# EAGLE board WAirU_v1.1 (EAGLE 9.2.2)
REV: C
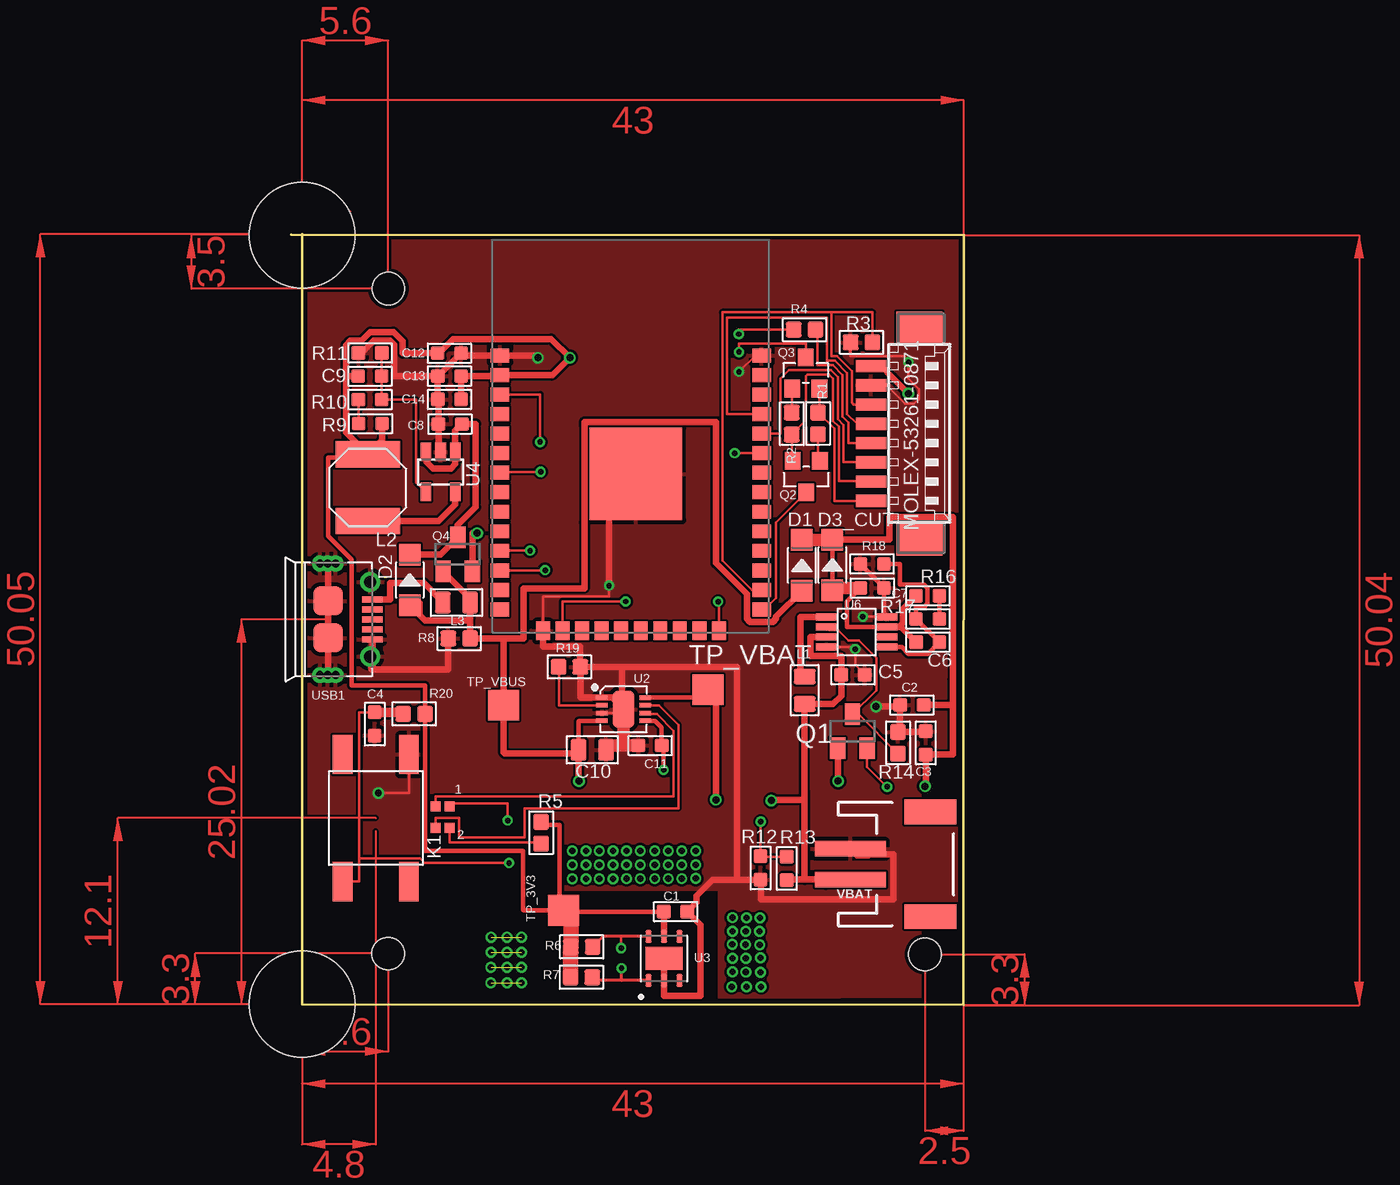
[diagram p0: board, top side]
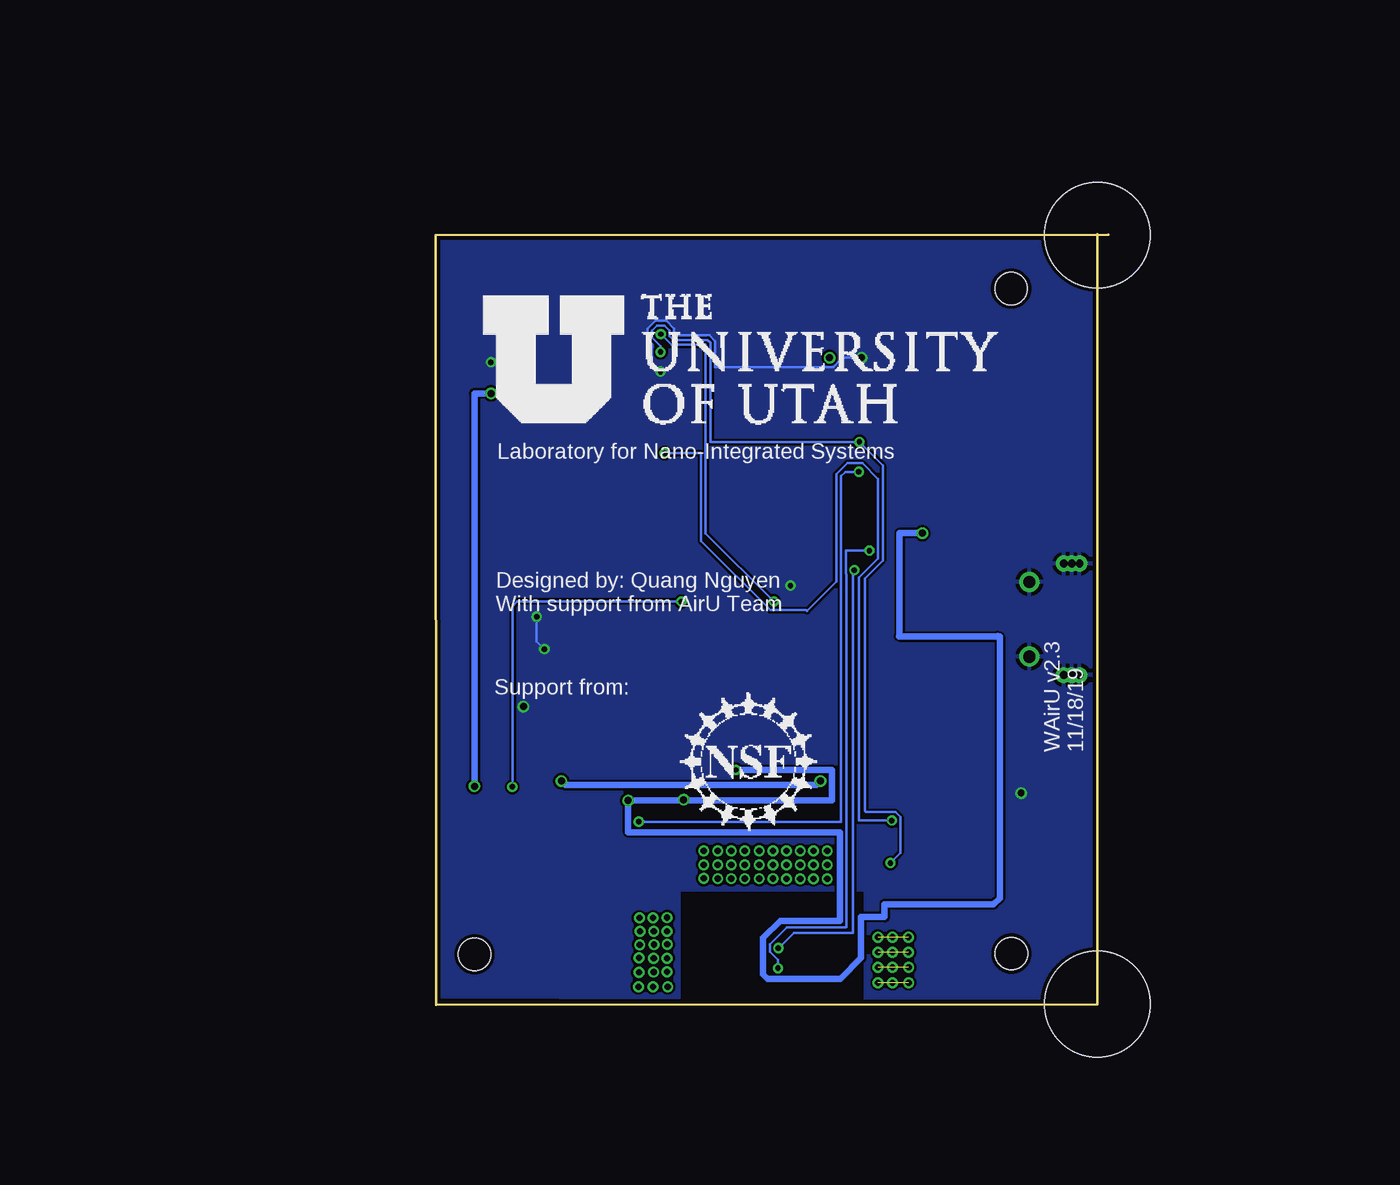
[diagram p1: board, bottom side, seen from below]

Size 43.72 x 50.1 mm. Coordinates in mm from the lower left corner, seen from the top.
Outline: 0,50.05 43.72,50.03 43.7,0 0.7,0.05 0.72,50.1
Copper layers (1*16): Top 0.035mm / dielectric 1.5mm / Bottom 0.035mm
Design rules "seeed-studio-2-layer": minimum track width 6mil, minimum drill 12mil, track to track 6mil, track to pad 6mil, pad to pad 6mil, via to via 6mil, smd to smd 0mil, copper to edge 10mil, drill to drill 10mil, minimum pad ring 10mil, minimum via ring 6mil, stop-mask expansion 2mil, vias tented up to drill 100mil, thermal gap 10mil
Holes 6.86 mm at 0.71,50.04 0.73,0.06
Holes 2.1 mm at 6.31,46.55 6.3,3.34 41.19,3.3

## Footprints (pad centres in the part's own frame; a part is rotated, then mirrored left to right if it is on the bottom)
C0603 = smd 0.889 x 0.889: 1 0,0.762; 2 0,-0.762
C0805 = smd 1.397 x 1.016: 1 0,0.889; 2 0,-0.889
SOD-123 = smd 1.397 x 1.397: + -1.651,0; - 1.651,0
SW4-SMD-6.0X6.0X5.0MM = smd 2.54 x 1.27: 1 -4.129,2.159; 2 -4.129,-2.159; 3 4.129,-2.159; 4 4.129,2.159
L0805 = smd 1.016 x 1.397: 1 -0.889,0; 2 0.889,0
L5040S = smd 4.2 x 1.7: 1 0,2.175; 2 0,-2.175
53261-08 = smd 0.8 x 2: 1 4.375,-2.5; 2 3.125,-2.5; 3 1.875,-2.5; 4 0.625,-2.5; 5 -0.625,-2.5; 6 -1.875,-2.5; 7 -3.125,-2.5; 8 -4.375,-2.5 | smd 2.1 x 3: S1 6.875,0.625; S2 -6.875,0.625
SOT23 = smd 1 x 1.4: 1 -0.95,-1.1; 2 0.95,-1.1; 3 0,1.1
SOT-23 = smd 1.016 x 1.143: 1 -0.889,-1.016; 2 0.889,-1.016; 3 0,1.016
R0603 = smd 1.016 x 1.016: 1 0,0.708; 2 0,-0.708
R0603' = smd 0.889 x 0.889: 1 0,0.762; 2 0,-0.762
TP20SQ = smd 2 x 2: TP 0,0
SMD-19-237A = smd 0.65 x 0.65: 1 -0.7,0.45; 2 0.7,0.45; 3 -0.7,-0.45; 4 0.7,-0.45
DFN8G-0.5-3X3MM = smd 0.3 x 0.727: 1 -0.75,-1.413; 2 -0.25,-1.413; 3 0.25,-1.413; 4 0.75,-1.413; 5 0.75,1.413; 6 0.25,1.413; 7 -0.25,1.413; 8 -0.75,1.413 | smd 2.413 x 1.397: HEAT 0,0
SON100P300X300X80-7N = smd 0.86 x 0.42: 1 -1.435,1; 2 -1.435,0; 3 -1.435,-1; 4 1.435,-1; 5 1.435,0; 6 1.435,1 | smd 1.5 x 2.4: 7 0,0
SOT-23-5 = smd 0.69 x 1.2: 1 -0.95,-1.3; 2 0,-1.3; 3 0.95,-1.3; 4 0.95,1.3; 5 -0.95,1.3
MSOP-8 = smd 0.45 x 1.35: 1 0,0; 2 0.65,0; 3 1.3,0; 4 1.95,0; 5 1.95,3.95; 6 1.3,3.95; 7 0.65,3.95; 8 0,3.95
WROOM32_SKINNY = smd 1.2 x 0.9: 1 -8.5,5; 2 -8.5,3.73; 3 -8.5,2.46; 4 -8.5,1.19; 5 -8.5,-0.08; 6 -8.5,-1.35; 7 -8.5,-2.62; 8 -8.5,-3.89; 9 -8.5,-5.16; 10 -8.5,-6.43; 11 -8.5,-7.7; 12 -8.5,-8.97; 13 -8.5,-10.24; 14 -8.5,-11.51; 25 8.5,-11.51; 26 8.5,-10.24; 27 8.5,-8.97; 28 8.5,-7.7; 29 8.5,-6.43; 30 8.5,-5.16; 31 8.5,-3.89; 32 8.5,-2.62; 33 8.5,-1.35; 34 8.5,-0.08; 35 8.5,1.19; 36 8.5,2.46; 37 8.5,3.73; 38 8.5,5 | smd 0.9 x 1.2: 15 -5.7,-12.9; 16 -4.43,-12.9; 17 -3.16,-12.9; 18 -1.89,-12.9; 19 -0.62,-12.9; 20 0.65,-12.9; 21 1.92,-12.9; 22 3.19,-12.9; 23 4.46,-12.9; 24 5.73,-12.9 | smd 6 x 6: P$1 0.34,-2.7
MICRO-USB5+6P-SMD-0.65-AB = smd 0.4 x 1.35: 1 -1.3,2.875; 2 -0.65,2.875; 3 0,2.875; 4 0.65,2.875; 5 1.3,2.875 | smd 1.9 x 1.9: P1 -1.2,0; P2 1.2,0 | drill 0.508 pad 1.016: P3_1 -3.625,-0.533; P3_2 -3.625,-0.025; P3_3 -3.625,0.483; P4_1 3.625,-0.533; P4_2 3.625,-0.025; P4_3 3.625,0.483 | drill 0.8: P5 -2.425,2.73; P6 2.425,2.73
JST-2-SMD = smd 1 x 4.6: 1 -1,-3.7; 2 1,-3.7 | smd 1.6 x 3.4: NC1 -3.4,1.5; NC2 3.4,1.5

## Placement (x,y rotation side)
C1  1uf  [C0603]  24.98,6.06 270 top
C2  100nf  [C0603]  40.34,19.49 90 top
C3  1uf  [C0603]  41.24,17.03 0 top
C4  1uf  [C0603]  5.43,18.27 180 top
C5  10uf  [C0603]  36.52,21.46 270 top
C6  22uf  [C0603]  41.37,23.58 270 top
C7  22uf  [C0603]  37.77,27.1 270 top
C8  10uf  [C0603]  10.33,37.76 90 top
C9  100pf  [C0603]  5.12,40.87 270 top
C10  22uf  [C0805]  19.57,16.58 270 top
C11  4.7uf  [C0603]  23.32,16.86 90 top
C12  10uf  [C0603]  10.28,42.37 270 top
C13  10uf  [C0603]  10.29,40.87 90 top
C14  10uf  [C0603]  10.29,39.36 90 top
D1  20V-1A  [SOD-123]  33.19,28.57 90 top
D2  20V-1A  [SOD-123]  7.71,27.63 90 top
D3_CUT  20V-1A  [SOD-123]  35.17,28.59 90 top
K1  [SW4-SMD-6.0X6.0X5.0MM]  5.5,12.15 90 top
L1  2.2UH-1.2A  [L0805]  33.37,20.46 90 top
L2  4.7uH  [L5040S]  4.98,33.62 180 top
L3  330R-1500MA  [L0805]  10.74,26.16 0 top
MOLEX-53261-0871  53261-08  [53261-08]  40.2,37.15 270 top
Q1  BSS84  [SOT23]  36.48,17.8 0 top
Q2  MMBT3904LT1G  [SOT-23]  33.47,34.35 180 top
Q3  MMBT3904LT1G  [SOT-23]  33.44,41.08 0 top
Q4  BSS84  [SOT23]  10.82,29.29 0 top
R1  10K  [R0603]  34.24,37.8 0 top
R2  10K  [R0603]  32.54,37.79 180 top
R3  4.7K  [R0603]  37.07,43.07 90 top
R4  220R  [R0603]  33.37,43.89 90 top
R5  330R  [R0603]  16.25,11.19 180 top
R6  4.7K  [R0603]  18.89,3.79 270 top
R7  4.7K  [R0603]  18.87,1.8 270 top
R8  100K 1/10W  [R0603]  10.92,23.82 90 top
R9  470K  [R0603']  5.15,37.79 90 top
R10  69.8K 1/10W  [R0603']  5.12,39.35 90 top
R11  120K  [R0603']  5.14,42.38 90 top
R12  100K 1/10W  [R0603']  30.51,8.91 180 top
R13  100K 1/10W  [R0603']  32.21,8.88 0 top
R14  100K 1/10W  [R0603]  39.44,17.04 0 top
R16  680K  [R0603']  41.37,26.59 90 top
R17  69.8K 1/10W  [R0603']  41.37,25.09 90 top
R18  100K 1/10W  [R0603']  37.76,28.66 90 top
R19  6.8K  [R0603]  18.08,21.98 270 top
R20  10K  [R0603]  7.99,18.92 270 top
TP_3V3  TPTP20SQ  [TP20SQ]  17.7,6.14 0 top
TP_VBAT  TPTP20SQ  [TP20SQ]  27.08,20.5 0 top
TP_VBUS  TPTP20SQ  [TP20SQ]  13.8,19.48 180 top
U1  19-237A/BHR6GHC-M01/2T  [SMD-19-237A]  9.83,12.22 270 top
U2  CN3065-DFN8  [DFN8G-0.5-3X3MM]  21.6,19.22 270 top
U3  HDC1080DMBT  [SON100P300X300X80-7N]  24.23,3.02 90 top
U4  PAM2305AABADJ  [SOT-23-5]  9.71,34.64 180 top
U6  PAM2401  [MSOP-8]  34.78,25.21 270 top
U7  ESP32_WROOM32_SKINNY  [WROOM32_SKINNY]  22.07,37.22 0 top
USB1  ZX62-B-5PA  [MICRO-USB5+6P-SMD-0.65-AB]  2.41,25.07 270 top
VBAT  [JST-2-SMD]  40.05,9.15 270 top

## Library data of the parts
C1 C3 C4 = Seeed-Capacitor; MPN: CC0603KRX7R8BB105
C2 = Seeed-Capacitor; MPN: CC0603KRX7R9BB104
C5 C8 C12-C14 = Seeed-Capacitor; MPN: CC0603KRX5R6BB106
C6 C7 = OPL_Capacitor; MPN: CC0603KRX5R6BB106
C9 = OPL_Capacitor; MPN: CC0603JRNPO9BN101
C10 = Seeed-OPL-Capacitor; MPN: CC0805MKX5R5BB226
C11 = OPL_Capacitor; MPN: CC0603KRX5R6BB475
D1 D2 D3_CUT = Seeed-OPL-Diode; MPN: B5819W
K1 = OPL_Switch; MPN: DTSM-62K-S-V-T/R(SN431)
L1 = OPL_Inductor; MPN: LQM2MPN2R2MG0
L2 = OPL_Inductor
L3 = Seeed-Inductor; MPN: BLM21PG331SN1D
MOLEX-53261-0871 = con-molex; MF: MOLEX; OC_FARNELL: 1125376; OC_NEWARK: unknown
Q1 Q4 = BSS84; AVAILABILITY: Unavailable; DESCRIPTION: P-Channel Enhancement Mode Field Effect Transistor; MF: MICROSS/On Semiconductor; MP: BSS84; PACKAGE: SOT-23 ON Semiconductor; PRICE: None
Q2 Q3 = Seeed-Transistor; MPN: MMBT3904LT1G
R1 R2 R20 = Seeed-Resistor; MPN: RC0603FR-0710KL
R3 R4 = Seeed-Resistor; MPN: RC0603JR-07220RL
R5 = Seeed-Resistor; MPN: RC0603FR-07330RL
R6 R7 = Seeed-Resistor; MPN: RC0603JR-074K7L
R8 R14 = Seeed-Resistor; MPN: RC0603JR-07100KL
R9 = Seeed-OPL-Resistor; MPN: RC0603FR-07470KL
R10 R17 = Seeed-OPL-Resistor; MPN: RC0603FR-0769K8L
R11 = Seeed-OPL-Resistor; MPN: RC0603FR-07120KL
R12 R13 R18 = OPL_Resistor; MPN: RC0603JR-07100KL
R16 = Seeed-OPL-Resistor; MPN: RC0603FR-07680KL
R19 = Seeed-Resistor; MPN: RC0805JR-07220KL
TP_3V3 TP_VBAT TP_VBUS = testpad
U1 = SS_OPL_Unmade
U2 = Seeed-IC; MPN: CN3065
U3 = HDC1080DMBT_TITempHum; DESCRIPTION: HDC1080 Low Power, High Accuracy Digital Humidity Sensor with Temperature Sensor 6-WSON -40 to 125; DIGI-KEY_PART_NUMBER: 296-43864-1-ND; DIGI-KEY_PURCHASE_URL: https://www.digikey.com/product-detail/en/texas-instruments/HDC1080DMBT/296-43864-1-ND/5878615?utm_source=snapeda&utm_medium=aggregator&utm_campaign=symbol; MF: Texas Instruments; MP: HDC1080DMBT; PACKAGE: WDFN-6 Texas Instruments
U4 = OPL_IC; MPN: LP2985-33DBVR
U6 = PAM2401_dcdcConverter
U7 = microbuilder
USB1 = Seeed-Connector; MPN: ZX62-B-5PA
VBAT = SparkFun-Connectors; PROD_ID: CONN-11443

## Nets
3.3V: C1.2 C9.2 C12.2 C13.2 C14.2 L2.2 R5.2 R6.2 R7.2 R9.2 R20.1 TP_3V3.TP U3.5 U7.2
5.0V: C2.2 C3.2 D1.- D3_CUT.- MOLEX-53261-0871.8
BAT_CHECK: R12.2 R13.1 U7.7
CHARGING: U1.4 U2.7
CHG_DONE: U1.3 U2.6
DTR: MOLEX-53261-0871.2 Q2.2 R2.1
EN_PAM2401: Q1.2 U7.24
GND: C1.1 C2.1 C3.1 C4.1 C5.1 C7.1 C8.1 C10.1 C11.1 C12.1 C13.1 C14.1 K1.3 MOLEX-53261-0871.7 R3.1 R8.1 R11.1 R12.1 R14.1 R18.1 R19.1 U2.1 U2.3 U2.HEAT U3.2 U3.7 U4.2 U6.4 U6.8 U7.1 U7.15 U7.38 U7.P$1 USB1.5 USB1.P1 USB1.P2 USB1.P3_1 USB1.P3_2 USB1.P3_3 USB1.P4_1 USB1.P4_2 USB1.P4_3 USB1.P5 USB1.P6 VBAT.1
GP_LED: U1.1 U7.33
GPIO0: Q2.3 U7.25
N$3: L1.2 U6.1
N$6: R19.2 U2.2
N$7: Q1.3 R14.2 U6.2
N$8: L2.1 U4.5
N$9: R5.1 U1.2
N$10: C6.1 R17.1 R18.2 U6.5
N$12: Q3.1 R2.2
N$13: Q2.1 R1.2
N$22: C9.1 R10.2 R11.2 U4.4
N$24: R16.2 R17.2
N$82: R9.1 R10.1
PAM2401_OUT: C6.2 C7.2 D3_CUT.+ R16.1 U6.7
PM_SET: MOLEX-53261-0871.6 R3.2 U7.26
PMS_TX: MOLEX-53261-0871.4 R4.2
RESET: C4.2 K1.1 Q3.3 R20.2 U7.3
RTS: MOLEX-53261-0871.1 Q3.2 R1.1
RXD0: MOLEX-53261-0871.3 U7.34
SCL: R6.1 U3.6 U7.12
SDA: R7.1 U3.1 U7.11
TXD0: MOLEX-53261-0871.5 U7.35
U2RXD: R4.1 U7.16
V_IN: C8.2 D2.- Q4.3 U4.1 U4.3
VBAT: C5.2 C11.2 L1.1 Q4.2 R13.2 TP_VBAT.TP U2.5 U2.8 U6.3 VBAT.2
VBUS: C10.2 D1.+ D2.+ L3.2 Q1.1 Q4.1 R8.2 TP_VBUS.TP U2.4
VBUS_RAW: L3.1 USB1.1

## Tracks (layer width: path | path; a pad name or v marks a point on that pad's centre or on a via)
3.3V  (via drill 0.45)
  Top 0.152: 9.45,42.47 9.52,42.4 C12.2 | 13.6,40.98 U7.2 | 4.77,35.59 L2.2 | R5.2 16.43,11.72 | 17.44,6.41 TP_3V3.TP | 17.7,5.63 TP_3V3.TP | 17.78,6.06 TP_3V3.TP | 15.08,6.17 15.11,6.14
  Top 0.203: 24.23,6.05 C1.2 | R6.2 18.16,3.76
  Top 0.305: 4.77,35.59 2.41,35.59 2.41,30.5 3.93,28.97 3.93,20.78 8.7,20.78 R20.1 8.7,10.01 15.08,10.01 15.08,6.17 | 15.11,6.14 TP_3V3.TP | 16.43,11.72 17.44,11.72 17.44,6.41 | 18.18,5.15 17.7,5.63 | C1.2 17.78,6.06
  Top 0.406: U3.5 24.23,6.05 | C14.2 C13.2 13.49,40.87 U7.2 17,40.95 v18.12,42.07 16.9,43.29 10.52,43.29 9.7,42.47 9.45,42.47 | R9.2 5.91,36.73 L2.2 3.56,37.21 3.56,40.87 | C9.2 3.56,40.87 | 3.56,40.87 3.56,42.9 3.85,43.18 4.58,43.18 5.14,43.74 6.66,43.74 7.26,43.14 7.26,42.37 C12.2
  Top 1.016: R6.2 18.18,5.15 | 18.16,3.76 R7.2
5.0V  (via drill 0.45)
  Top 0.152: MOLEX-53261-0871.8 37.66,41.57
  Top 0.305: 35.15,30.22 D3_CUT.-
  Top 0.406: 41.07,19.52 C2.2 | 41.18,16.33 C3.2 | v40.12,39.75 39.05,40.82 38.35,41.53 MOLEX-53261-0871.8 | D3_CUT.- 38.88,30.25 38.88,31.71 42.99,31.71 42.99,22.87 42.99,21.16 42.99,19.52 | C2.2 41.24,19.35 | 41.24,16.47 C3.2 | 42.99,19.52 42.99,16.29 42.97,16.27 C3.2 | C3.2 41.24,14.26 v41.2,14.22 | C2.2 42.97,19.49 42.99,19.52
  Top 0.813: D1.- 35.15,30.22
  Bottom 0.406: v40.12,39.75 41.2,39.75 v41.2,14.22
BAT_CHECK  (via drill 0.35)
  Top 0.152: v16.21,34.65 13.62,34.65 U7.7 | R13.1 30.54,9.64 R12.2 30.51,11.91 v30.52,11.92
  Bottom 0.152: v16.21,34.65 17.09,34.65 17.37,34.38 17.37,11.9 30.5,11.9 v30.52,11.92
CHARGING
  Top 0.152: 9.51,11.52 U1.4 9.38,12.15 10.91,12.15 10.91,10.88 15.18,10.88 15.18,12.79 25.17,12.79 25.17,18.19 23.9,19.46 23.03,19.46 U2.7
CHG_DONE
  Top 0.152: U2.6 23.08,18.91 23.76,18.91 24.86,17.81 24.86,13.54 9.38,13.54 U1.3
DTR
  Top 0.152: Q2.2 32.54,35.41 R2.1 33.47,38.01 33.47,40.89 33.54,40.97 34.95,40.97 35.22,40.7 35.22,37.96 35.6,37.58 35.6,34.05 37.68,34.05 MOLEX-53261-0871.2
EN_PAM2401  (via drill 0.35)
  Top 0.152: Q1.2 37.43,15.49 v38.73,14.18 | U7.24 27.8,26.17 v27.75,26.21
  Bottom 0.152: v27.75,26.21 38.43,26.21 38.73,25.91 v38.73,14.18
GND  (via drill 0.35, 0.45)
  Top 0.152: 11.19,42.22 C12.1 | U4.2 9.57,36.09 | 9.57,39.32 C14.1 | U7.38 30.17,42.22 v29.11,41.16 | R3.1 36.36,42.18 39.83,42.18 40.13,41.87 40.13,41.78 v40.12,41.77 40.12,40.7 40.8,40.03 40.8,39.39 40.49,39.08 39.87,39.08 38.68,40.28 MOLEX-53261-0871.7 | U7.15 16.37,26.56 20.66,26.56 v20.66,27.26 | U2.3 21.35,18.97 21.59,19.21 | U6.4 36.53,23.26 v36.66,23.13 36.66,22.08 C5.1 | v37.15,25.24 38.69,25.24 38.73,25.28 | v5.67,13.77 7.66,13.77 7.67,13.79 7.66,13.79 K1.3
  Top 0.203: C13.1 9.55,40.87
  Top 0.305: U6.8 38.73,25.28 38.53,25.48 C7.1 38.53,27.13 R18.1
  Top 0.406: 11.19,42.22 U7.1 15.88,42.22 v16.03,42.07 | 9.57,36.09 C8.1 9.57,39.32 | C12.1 9.55,40.87 | R11.1 4.57,42.38 5.37,43.18 6.42,43.18 6.7,42.91 6.7,41.85 6.68,41.84 6.68,40.86 6.69,40.87 C13.1 C14.1 | C3.1 41.2,17.75 R14.1 39.58,17.89 C2.1 39.48,19.4 v38.02,19.4 | 20.74,16.86 21.59,16.86 C11.1 | 21.59,19.21 U2.HEAT 20.85,19.98 18.8,19.98 18.8,21.96 R19.1 | R19.1 21.49,21.98 | 21.49,21.98 28.97,21.98 28.97,8.15 | 21.49,21.98 21.49,19.31 | 28.97,8.15 27.4,8.15 26.34,7.08 26.34,6.66 C1.1 26.6,5.2 26.6,0.61 24.23,0.61 U3.2 U3.7 | 28.97,8.15 R12.1 30.55,8.11 30.55,6.86 39.16,6.86 39.16,9.79 36.71,9.79 VBAT.1 36.77,9.73 37.51,9.73 37.41,9.83 | R8.1 10.21,21.82 5.24,21.82 USB1.P6 5.28,22.07 USB1.5 | U7.15 16.37,23.3 16.38,23.29 18.79,23.29 R19.1 | v20.66,27.26 20.66,32.77 U7.P$1 | USB1.P4_2 USB1.P4_3 | USB1.P4_1 USB1.P4_2 | USB1.P3_1 USB1.P3_2 | USB1.P3_2 2.41,27.95 USB1.P1 USB1.P2 2.41,21.47 USB1.P4_2 | USB1.P3_2 USB1.P3_3
  Top 0.813: C10.1 20.74,16.86 C11.1 | 21.59,16.86 21.59,19.21 21.49,19.31
  Bottom 0.152: v16.03,42.07 17.27,42.07 17.87,41.47 23.62,41.47 23.63,41.46 25.56,41.46 25.56,43.16 25.92,43.53 28.14,43.53 28.22,43.61 28.22,43.96 28.73,44.47 29.39,44.47 29.42,44.49 29.95,43.96 29.95,43.25 29.66,42.96 29.66,41.71 v29.11,41.16 | v36.66,23.13 37.15,23.63 v37.15,25.24
  pour Top: 1.02,0.44 1.02,49.71 43.53,49.71 43.53,0.56 27.86,0.49 27.86,7.52 15.77,7.52 15.77,0.44
  pour Bottom: 1.02,0.44 1.02,49.71 43.53,49.71 43.53,0.57 27.89,0.5 27.89,7.52 15.8,7.52 15.8,0.44
GP_LED  (via drill 0.35)
  Top 0.152: U7.33 v28.83,35.87 | v14.07,11.99 14.07,13.11 10.47,13.11 U1.1
  Bottom 0.152: v28.83,35.87 26.47,35.87 26.47,35.86 26.47,30.17 21.97,25.67 19.64,25.67 19.58,25.61 17.67,27.51 17.67,34.51 16.97,35.21 15.98,35.21 14.97,34.2 14.97,29.02 16.21,27.78 16.21,12 v14.07,12 v14.07,11.99
GPIO0
  Top 0.152: Q2.3 31.5,31.36 31.5,26.46 30.75,25.71 U7.25
N$2  (via drill 0.4 pad 0.6)  (2 unrouted)
  other vias: 14.97,1.45 14.03,1.45 12.98,1.45
N$3
  Top 0.406: U6.1 33.11,25.21 33.11,21.61 L1.2
N$4  (via drill 0.4)
  other vias: 28.68,3.04
N$5  (via drill 0.4)
  other vias: 29.55,3.03
N$6
  Top 0.152: U2.2 17.41,19.47 17.41,21.94 R19.2
N$7
  Top 0.152: 35.27,24.63 34.86,24.63 U6.2 | 36.58,19 Q1.3 | 36.48,19.35 Q1.3 | 34.86,24.63 U6.2 | R14.2 36.87,18.9 Q1.3 | U6.2 34.98,24.36 35.55,24.36 36.23,23.69 36.89,23.69 38.03,22.54 38.03,20.45 Q1.3
N$8
  Top 0.152: U4.5 10.61,33.4 | 5,31.47 L2.1
  Top 0.406: U4.5 10.66,32.54 9.6,31.47 5,31.47
N$9
  Top 0.152: U1.2 10.28,10.55 16.18,10.55 R5.1
N$10
  Top 0.305: C6.1 42.12,23.58 | 42.12,23.58 R17.1 40.61,25.83 40.62,25.84 41.12,25.84 41.36,26.09 41.36,27.1 41.12,27.34 39.56,27.34 39.56,28.66 R18.2 | U6.5 39.68,23.26 40.11,22.83 41.37,22.83 42.12,23.58
N$11  (via drill 0.4)
  other vias: 18.27,8.21
N$12
  Top 0.152: Q3.1 32.56,38.51 R2.2
N$13
  Top 0.152: R1.2 34.24,35.49 Q2.1
N$14  (via drill 0.4)
  other vias: 21.8,8.21
N$15  (via drill 0.4 pad 0.6)  (2 unrouted)
  other vias: 14.97,2.44 14.03,2.44 12.98,2.44
N$16  (via drill 0.4 pad 0.6)  (2 unrouted)
  other vias: 14.98,3.42 14.04,3.42 12.99,3.42
N$18  (via drill 0.4)
  other vias: 28.68,2.15
N$19  (via drill 0.4 pad 0.6)  (2 unrouted)
  other vias: 14.98,4.41 14.04,4.41 12.99,4.41
N$20  (via drill 0.4)
  other vias: 19.16,8.21
N$21  (via drill 0.4)
  other vias: 22.69,8.21
N$22
  Top 0.152: U4.4 8.14,33.97 8.14,39.35 R10.2 C9.1 5.88,42.44 R11.2
N$23  (via drill 0.4)
  other vias: 24.5,8.22
N$24
  Top 0.305: R17.2 | R17.2 R16.2
N$25  (via drill 0.4)
  other vias: 29.55,2.14
N$26  (via drill 0.4)
  other vias: 30.45,3.92
N$27  (via drill 0.4)
  other vias: 30.51,3.06
N$28  (via drill 0.4)
  other vias: 30.5,2.12
N$29  (via drill 0.4)
  other vias: 20.02,8.21
N$30  (via drill 0.4)
  other vias: 20.93,8.21
N$31  (via drill 0.4)
  other vias: 26.29,8.22
N$34  (via drill 0.4)
  other vias: 28.63,1.19
N$35  (via drill 0.4)
  other vias: 28.67,3.94
N$36  (via drill 0.4)
  other vias: 25.39,8.22
N$37  (via drill 0.4)
  other vias: 28.68,4.79
N$38  (via drill 0.4)
  other vias: 18.27,9.1
N$39  (via drill 0.4)
  other vias: 21.8,9.1
N$40  (via drill 0.4)
  other vias: 22.69,9.1
N$41  (via drill 0.4)
  other vias: 24.5,9.11
N$42  (via drill 0.4)
  other vias: 23.63,9.1
N$43  (via drill 0.4)
  other vias: 19.16,9.1
N$44  (via drill 0.4)
  other vias: 20.02,9.1
N$45  (via drill 0.4)
  other vias: 20.93,9.1
N$46  (via drill 0.4)
  other vias: 23.63,8.22
N$53  (via drill 0.4)
  other vias: 29.6,1.19
N$54  (via drill 0.4)
  other vias: 29.54,3.93
N$55  (via drill 0.4)
  other vias: 29.54,4.79
N$56  (via drill 0.4)
  other vias: 26.29,9.11
N$57  (via drill 0.4)
  other vias: 25.39,9.1
N$61  (via drill 0.4)
  other vias: 30.43,4.79
N$62  (via drill 0.4)
  other vias: 30.47,5.66
N$64  (via drill 0.4)
  other vias: 30.54,1.19
N$67  (via drill 0.4)
  other vias: 18.27,10.01
N$68  (via drill 0.4)
  other vias: 21.8,10.02
N$69  (via drill 0.4)
  other vias: 22.69,10.02
N$71  (via drill 0.4)
  other vias: 28.67,5.68
N$72  (via drill 0.4)
  other vias: 29.59,5.66
N$73  (via drill 0.4)
  other vias: 24.5,10.02
N$74  (via drill 0.4)
  other vias: 23.63,10.02
N$75  (via drill 0.4)
  other vias: 19.16,10.01
N$76  (via drill 0.4)
  other vias: 20.02,10.01
N$77  (via drill 0.4)
  other vias: 20.93,10.01
N$79  (via drill 0.4)
  other vias: 26.29,10.02
N$80  (via drill 0.4)
  other vias: 25.39,10.02
N$82
  Top 0.152: R10.1 4.39,39.32 R9.1
PAM2401_OUT
  Top 0.305: 36.91,27.19 C7.2 | 37.27,27.1 C7.2 | U6.7 36.14,24.56 36.14,26.23 C7.2 | D3_CUT.+ 35.17,30.07 35.19,30.09
  Top 0.406: 36.92,27.18 C7.2 | 39.63,24.56 U6.7 | R16.1 39.76,25.75 39.76,24.84 39.63,24.71 39.63,24.56 | 39.63,24.56 C6.2
  Top 0.813: C7.2 35.33,27.1 D3_CUT.+
PM_SET
  Top 0.152: MOLEX-53261-0871.6 36.56,39.03 36.44,39.15 36.44,41.2 35.46,42.19 35.12,42.19 35.12,45.01 35.1,45.03 | 30.67,26.98 U7.26 29.97,26.98 29.96,26.97 28.03,28.9 28.03,45.03 35.1,45.03 | R3.2 37.78,45.03 35.1,45.03
PMS_TX
  Top 0.152: MOLEX-53261-0871.4 36.23,36.53 | 36.23,36.53 36.21,36.54 | 36.23,36.53 36.23,37.86 35.83,38.26 35.83,40.95 35.2,41.58 34.2,41.58 34.2,43.78 R4.2
RESET  (via drill 0.35)
  Top 0.152: U7.3 16.18,39.68 v16.18,36.59 | Q3.3 33.44,43.01 33.44,43 29.1,43 v29.1,42.44 | K1.1 4.43,8.02 4.43,9.54 | 4.43,9.54 4.43,19.03 C4.2 | v14.17,9.22 8.86,9.22 8.69,9.22 8.39,9.52 4.45,9.52 4.43,9.54
  Top 0.61: C4.2 7.18,19.03 R20.2
  Bottom 0.152: v29.1,42.44 29.1,42.83 29.64,43.38 29.64,43.84 29.32,44.16 28.86,44.16 28.53,43.84 28.53,43.48 28.27,43.22 26.05,43.22 25.86,43.04 25.86,36.59 v16.18,36.59 14.66,35.08 14.66,28.89 15.83,27.72 15.83,12.62 15.76,12.55 13.84,12.55 13.51,12.22 13.51,9.88 v14.17,9.22
RTS
  Top 0.152: Q3.2 34.33,38.6 R1.1 35.3,37.45 35.3,32.77 37.68,32.77 MOLEX-53261-0871.1
RXD0
  Top 0.152: U7.34 31.79,37.13 31.8,37.14 31.8,40.71 32.36,41.27 35.08,41.27 35.52,40.83 35.52,38.09 35.91,37.71 35.91,37.45 | MOLEX-53261-0871.3 35.91,35.28 35.91,37.45 | 35.91,37.45
SCL  (via drill 0.35)
  Top 0.152: U7.12 16.49,28.25 v16.5,28.27 | v21.45,3.7 21.45,4.44 21.42,4.46
  Top 0.203: U3.6 21.42,4.46 20.27,4.46 R6.1
  Bottom 0.152: v16.5,28.27 16.6,28.17 16.6,4.7 20.45,4.7 v21.45,3.7
SDA  (via drill 0.35)
  Top 0.152: v15.52,29.53 U7.11 | v21.47,2.39 21.47,2.3
  Top 0.203: U3.1 21.47,1.59 | 21.47,1.59 19.78,1.59 R7.1 | 21.47,1.59 21.47,2.3 21.46,2.31
  Bottom 0.152: v15.52,29.53 17.06,29.53 17.06,28.04 17.02,27.99 17.02,5.09 17.06,5.05 20.88,5.05 22,3.93 22,3.47 21.47,2.94 v21.47,2.39
TXD0
  Top 0.152: MOLEX-53261-0871.5 36.75,37.78 36.13,38.4 36.13,41.08 35.33,41.88 34.82,41.88 34.82,44.69 28.33,44.69 28.33,38.41 U7.35 30.59,38.39
U2RXD  (via drill 0.35)
  Top 0.152: R4.1 29.09,43.89 v29.09,43.61 | v21.74,26.23 17.64,26.23 U7.16
  Bottom 0.152: v29.09,43.61 28.39,42.91 26.96,42.91 26.95,42.92 26.49,42.92 26.48,42.91 26.16,42.91 26.16,30.65 v21.74,26.23
V_IN
  Top 0.152: 8.87,35.84 U4.3 | 11.09,37.7 C8.2
  Top 0.305: D2.- 8.36,29.28 | U4.1 10.69,35.92 | 8.76,35.93 U4.3
  Top 0.406: D2.- 9.71,29.28 Q4.3 10.82,31.18 11.99,32.35 11.99,37.77 11.16,37.77 11.09,37.7 | C8.2 10.66,37.33 U4.1 10.66,35.14 10.38,34.86 9.22,34.86 8.79,35.29 8.79,35.91 U4.3
VBAT  (via drill 0.35, 0.45)
  Top 0.305: U2.5 23.66,18.47 24.08,18.05 C11.2 24.21,16.74 v24.21,15.28 | U2.8 27.2,19.97
  Top 0.406: 33.37,8.15 32.25,8.15 R13.2 | 33.37,8.15 33.37,13.87 33.37,13.88 | 27.2,19.97 27.22,19.99 27.22,20.36 TP_VBAT.TP 27.6,20.5 v27.6,13.34 | Q4.2 11.77,30.66 v12.09,30.66 | 34.74,7.83 36.67,7.83 VBAT.2 33.37,8.15 | U6.3 33.75,23.91 33.75,22.68 35.76,22.68 C5.2 35.76,20.1 35.22,19.57 L1.1 33.37,13.88 | 33.37,13.88 33.37,13.33 31.26,13.33 v31.21,13.29
  Bottom 0.406: v27.6,13.34 27.63,13.31 | v12.09,30.66 13.56,30.66 13.56,23.95 | 13.56,23.95 13.6,23.95 | 13.56,23.95 7.19,23.95 | 7.19,23.95 7.19,23.97 | 7.19,23.95 7.19,23.94 7.06,23.94 7.06,6.94 7.46,6.54 14.55,6.54 14.55,5.71 16.06,5.71 16.06,3.06 17.42,1.71 22.16,1.71 22.43,1.99 22.43,4.36 21.31,5.48 17.45,5.48 17.45,11.23 31.21,11.23 v31.21,13.29 31.19,13.31 27.63,13.31 | v24.21,15.28 17.97,15.28 17.97,13.31 27.63,13.31
VBUS  (via drill 0.45)
  Top 0.305: U2.4 18.71,18.47 18.68,18.44 C10.2 18.44,16.34
  Top 0.406: 11.65,23.79 R8.2 | R8.2 13.8,23.82 | 13.8,23.82 13.8,23.83 13.81,23.82 15.1,23.82 15.11,23.83 15.11,27.08 19.06,27.08 19.06,31.37 19.05,31.37 19.05,37.67 19.06,37.67 19.06,37.9 27.6,37.9 27.6,28.72 29.61,26.7 29.61,25.11 29.82,24.9 31.31,24.9 31.52,25.11 31.52,25.25 D1.+ | 13.8,23.82 TP_VBUS.TP 13.8,16.42 13.88,16.34 18.44,16.34 C10.2 18.68,14.57 v18.71,14.55 | 11.63,25.18 11.43,24.98 8.71,24.98 8.35,25.34 8.35,26.13 8.03,26.45 7.56,26.45 7.4,26.29 D2.+ | 11.63,25.18 11.63,25.19 L3.2 11.63,26.43 Q4.1 | Q1.1 v35.53,14.56 v35.54,14.55 | R8.2 11.63,25.18
  Bottom 0.406: v18.71,14.55 18.96,14.3 35.29,14.3 v35.54,14.55
VBUS_RAW
  Top 0.305: L3.1 9.86,26.21
  Top 0.406: 9.86,26.21 8.64,27.43 6.43,27.43 6.43,26.37 6.44,26.37 USB1.1
(copper drawn outside any net)
  shapes: Top area x15

## Text on the board
bPlace: Laboratory for Nano-Integrated Systems | Designed by: Quang Nguyen / With support from AirU Team | Support from: | WAirU v2.3 / 11/18/19
tNames: 1 | 2